# EAGLE board plugV7-Relay-NO (EAGLE 7.5.0)
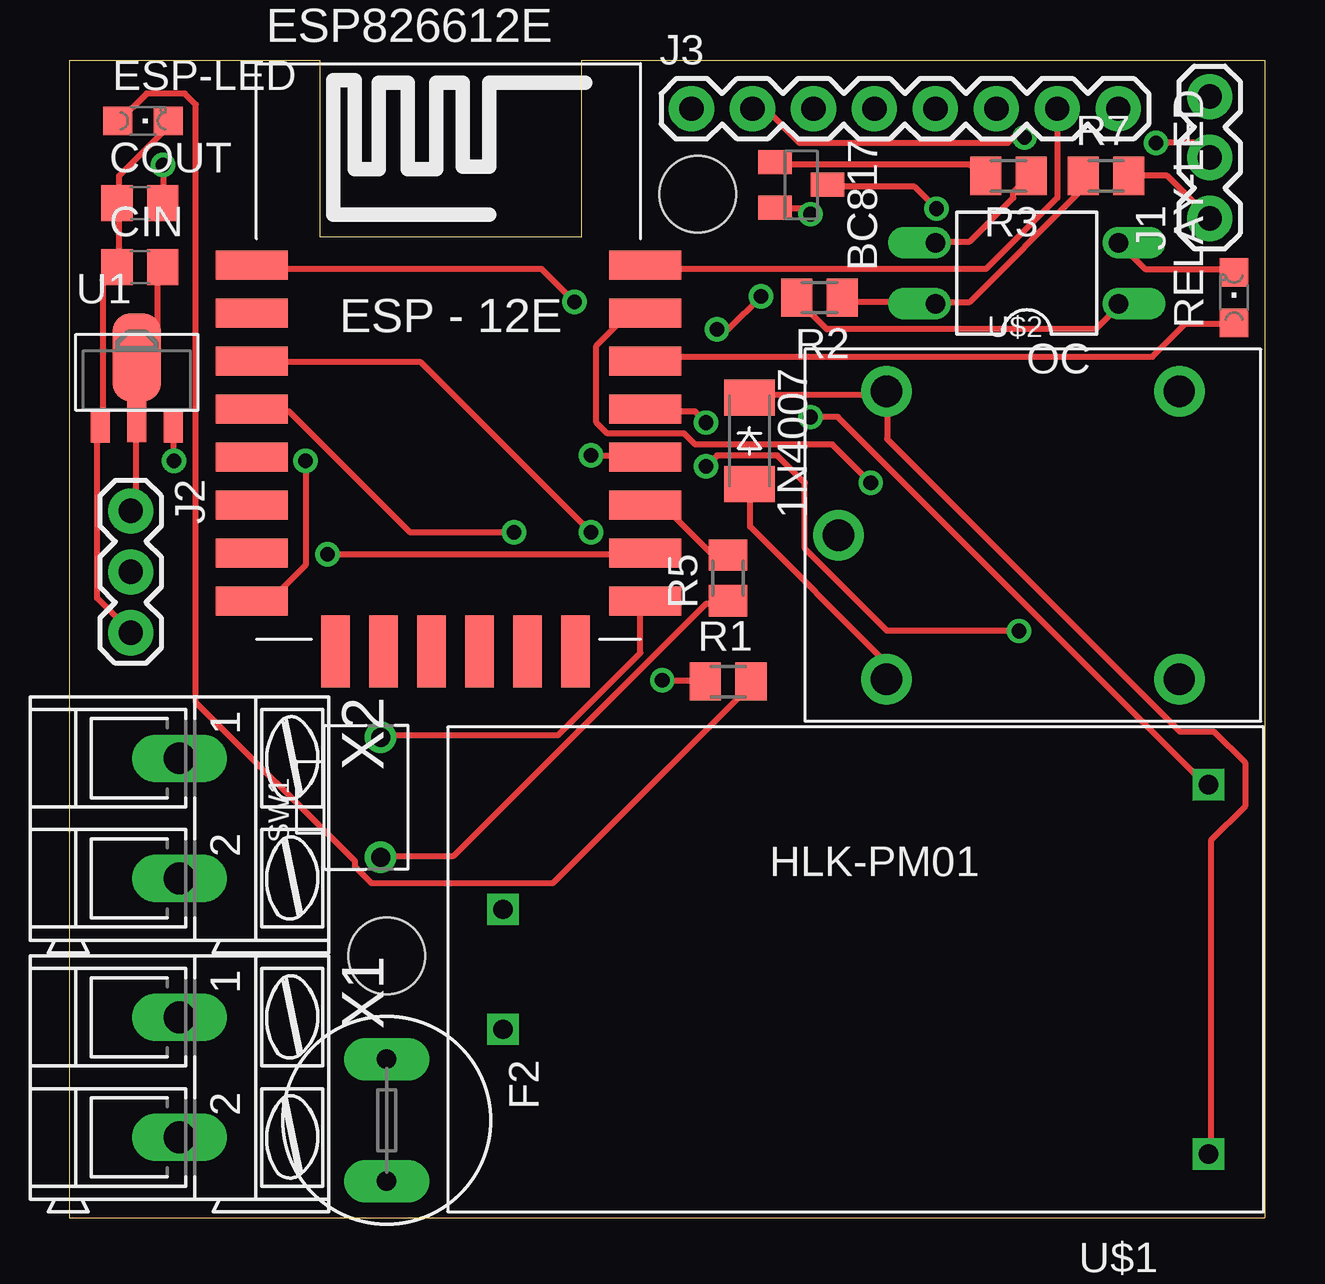
[diagram p0: board, top side]
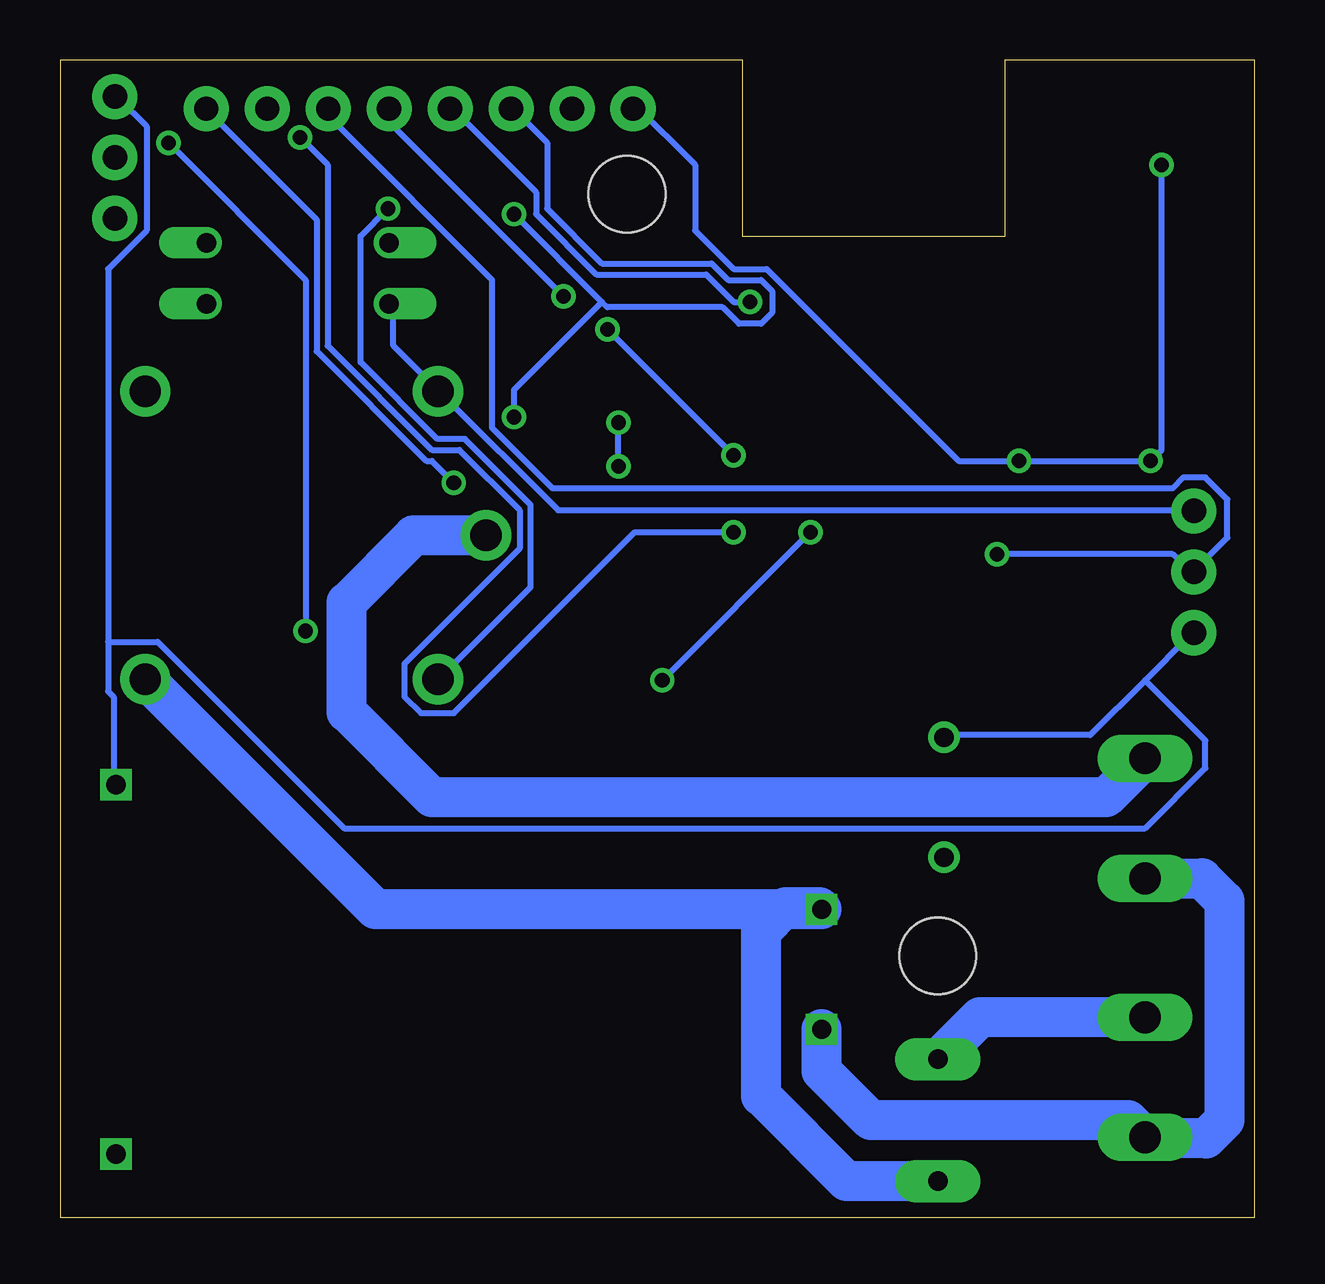
[diagram p1: board, bottom side, seen from below]

Size 49.78 x 48.26 mm. Coordinates in mm from the lower left corner, seen from the top.
Outline: 0,0 49.78,0 49.78,48.26 21.34,48.26 21.34,40.89 10.41,40.89 10.41,48.26 0,48.26 0,0
Copper layers (1*16): Top 0.035mm / dielectric 1.5mm / Bottom 0.035mm
Design rules "default": minimum track width 10mil, minimum drill 24mil, track to track 8mil, track to pad 8mil, pad to pad 8mil, via to via 8mil, smd to smd 8mil, copper to edge 40mil, drill to drill 8mil, minimum pad ring 10mil, minimum via ring 8mil, stop-mask expansion 4mil, vias tented up to drill 0mil, thermal gap 10mil
Holes 3.2 mm at 13.21,10.92 26.16,42.67

## Footprints (pad centres in the part's own frame; a part is rotated, then mirrored left to right if it is on the bottom)
SOD-123_MINI-SMA = smd 1.5 x 2.1: A 1.8,0; C -1.8,0
SOT23-BEC = smd 1 x 1.4: B -0.95,-1.1; C 0,1.1; E 0.95,-1.1
C0805 = smd 1.3 x 1.5: 1 -0.95,0; 2 0.95,0
ESP12E-SMD = smd 3 x 1.2: ADC -8.3,3.8; CH_PD -8.3,1.8; GND 8.1,-8.2; GPIO0 8.1,-2.2; GPIO2 8.1,-4.2; GPIO4 8.1,-0.2; GPIO5 8.1,1.8; GPIO12 -8.3,-4.2; GPIO13 -8.3,-6.2; GPIO14 -8.3,-2.2; GPIO15 8.1,-6.2; GPIO16 -8.3,-0.2; RESET -8.3,5.8; RXD0 8.1,3.8; TXD0 8.1,5.8; VCC -8.3,-8.2 | smd 1.2 x 3: CS0 -4.8,-10.3; GPIO9 -0.8,-10.3; GPIO10 1.2,-10.3; MISO -2.8,-10.3; MOSI 3.2,-10.3; SCLK 5.2,-10.3
CHIPLED_0805 = smd 1.2 x 1.2: A 0,-1.05; C 0,1.05
TR5 = drill 0.813 pad 1.778 long: 1 -2.54,0; 2 2.54,0
1X03 = drill 1.016 pad 1.88: 1 0,0; 2 2.54,0; 3 5.08,0
1X08_ROUND = drill 1.016 pad 1.88: 1 0,0; 2 2.54,0; 3 5.08,0; 4 7.62,0; 5 10.16,0; 6 12.7,0; 7 15.24,0; 8 17.78,0
DIL04 = drill 0.813 offset: 1 -1.27,-3.81; 2 1.27,-3.81; 3 1.27,3.81; 4 -1.27,3.81
M0805 = smd 1.3 x 1.6: 1 -0.95,0; 2 0.95,0
SW2-5.0-6.0X3.0X4.3MM = drill 0.8 pad 1.27: 1 -2.5,0; 2 2.5,0
SOT89 = smd 0.8 x 1.4: 1 -1.524,-1.905; 3 1.524,-1.905 | smd 0.8 x 1.9: 2 0,-1.651 | smd 2.032 x 3.65: 4 0,0.94
HLK-PM01 = drill 0.8 square: +5V 15.19,-7.76; AC1 -14.21,2.44; AC2 -14.21,-2.56; GND 15.19,7.64
RELAY-SONGLE = drill 1.3 pad 2.1: COM -8.1,0; NC 6.1,6; NO 6.1,-6; V+ -6.1,6; V- -6.1,-6
AK300/2 = drill 1.321 long: 1 -2.515,0; 2 2.489,0

## Placement (x,y rotation side)
1N4007  [SOD-123_MINI-SMA]  28.32,32.38 270 top
BC817  [SOT23-BEC]  30.48,43.05 270 top
CIN  1uF  [C0805]  2.92,39.62 0 top
COUT  1uF  [C0805]  2.92,42.29 0 top
ESP826612E  Value  [ESP12E-SMD]  15.88,33.91 0 top
ESP-LED  [CHIPLED_0805]  3.05,45.72 270 top
F2  [TR5]  13.21,4.06 270 top
J1  [1X03]  47.5,41.66 90 top
J2  [1X03]  2.54,29.46 270 top
J3  [1X08_ROUND]  25.91,46.23 0 top
OC  PC817  [DIL04]  39.88,39.37 90 top
R1  240  [M0805]  27.43,22.35 0 top
R2  1k  [M0805]  31.24,38.35 180 top
R3  470  [M0805]  39.12,43.43 180 top
R5  470  [M0805]  27.43,26.67 90 top
R7  240  [M0805]  43.18,43.43 0 top
RELAY-LED  [CHIPLED_0805]  48.51,38.35 0 top
SW1  [SW2-5.0-6.0X3.0X4.3MM]  12.95,17.53 90 top
U1  XC6206PR  [SOT89]  2.79,34.92 0 top
U$1  HLK-PM01  [HLK-PM01]  32.26,10.41 0 top
U$2  RELAY-SONGLE  [RELAY-SONGLE]  40.13,28.45 0 top
X1  220V  [AK300/2]  4.57,5.84 270 top
X2  Plug  [AK300/2]  4.57,16.64 270 top

## Library data of the parts
1N4007 = diode
BC817 = transistor-neu-to92
CIN COUT R1-R3 R5 R7 = rcl
ESP826612E = esp8266modules
ESP-LED RELAY-LED = led
F2 = fuse; OC_FARNELL: unknown; OC_NEWARK: unknown
J1 J2 = SparkFun-Connectors
J3 = SparkFun-Connectors; PROD_ID: CONN-08437
OC = optocoupler; MPN: PC817X4J000F; OC_FARNELL: 9707727; OC_NEWARK: 97K7059
SW1 = Seeed-OPL-Switch
U1 = IC
U$1 = HLK-PM01
U$2 = Seeed-OPL-Relay
X1 X2 = con-ptr500; OC_FARNELL: unknown; OC_NEWARK: unknown

## Nets
+5V: 1N4007.C CIN.2 J2.1 OC.4 R2.1 R7.1 U1.2 U1.4 U$1.+5V U$2.V+
EN: ESP826612E.CH_PD J3.2
GND: BC817.E CIN.1 COUT.1 ESP826612E.GND ESP-LED.C J1.3 J2.3 J3.3 SW1.2 U1.1 U$1.GND
GPIO0: ESP826612E.GPIO0 J3.5
GPIO2: ESP826612E.GPIO2 R5.2
GPIO4: ESP826612E.GPIO4 J1.2
GPIO5: ESP826612E.GPIO5 RELAY-LED.A
GPIO12: ESP826612E.GPIO12
GPIO13: ESP826612E.GPIO13
GPIO14: ESP826612E.GPIO14
GPIO15: ESP826612E.GPIO15 J2.2 J3.6
GPIO16: ESP826612E.GPIO16 R1.1
N$1: F2.2 U$1.AC1 U$2.NO
N$2: OC.3 R3.1
N$3: U$1.AC2 X1.2 X2.2
N$4: U$2.COM X2.1
N$5: BC817.B R3.2
N$6: OC.2 RELAY-LED.C
N$7: R5.1 SW1.1
N$8: ESP-LED.A R1.2
N$9: J1.1 R7.2
N$10: F2.1 X1.1
N$13: OC.1 R2.2
N$18: 1N4007.A BC817.C U$2.V-
RST: ESP826612E.RESET J3.4
RX: ESP826612E.RXD0 J3.8
TX: ESP826612E.TXD0 J3.7
V33: COUT.2 ESP826612E.VCC J3.1 U1.3

## Tracks (layer width: path | path; a pad name or v marks a point on that pad's centre or on a via)
+5V
  Top 0.254: R2.1 32.23,38.18 35.89,38.18 OC.4 36.12,38.18 37.49,38.18 42.06,42.75 42.06,43.43 R7.1 | CIN.2 3.66,39.55 3.66,36.58 2.97,35.89 U1.4 2.74,35.66 2.74,33.38 U1.2 2.74,33.15 2.74,29.49 J2.1 | 1N4007.C 28.35,34.29 33.83,34.29 U$2.V+ 34.06,34.29 34.06,32.46 46.25,20.27 47.68,20.27 48.97,18.97 48.97,17.14 47.55,15.72 47.55,2.74 U$1.+5V
  Bottom 0.254: J2.1 2.74,29.49 29.03,29.49 33.83,34.29 U$2.V+ 34.06,34.52 35.89,36.35 35.89,37.95 OC.4
EN  (via drill 0.61)
  Top 0.254: v21.72,28.57 14.63,35.66 7.77,35.66 ESP826612E.CH_PD | v39.78,45.03 39.32,45.03 39.09,44.81 30.4,44.81 29.03,46.18 28.57,46.18 J3.2
  Bottom 0.254: v21.72,28.57 25.83,28.57 33.38,21.03 34.75,21.03 35.43,21.72 35.43,23.09 30.63,27.89 30.63,29.49 33.15,32 34.29,32 38.63,36.35 38.63,43.89 v39.78,45.03
GND  (via drill 0.61)
  Top 0.254: 2.06,42.29 2.06,43.43 3.89,45.26 3.89,45.72 ESP-LED.C | 2.06,42.29 2.06,39.78 CIN.1 1.83,39.55 1.37,39.09 1.37,33.15 U1.1 1.14,32.92 1.14,25.83 2.52,24.46 J2.3 | 2.06,42.29 COUT.1 | ESP826612E.GND 23.77,25.6 23.77,23.55 20.34,20.12 13.03,20.12 SW1.2 | v30.86,41.83 30.63,42.06 29.49,42.06 BC817.E | v30.86,33.38 32,33.38 47.32,18.06 U$1.GND
  Bottom 0.254: 4.57,22.4 2.74,24.23 J2.3 | 4.57,22.4 6.86,20.12 12.8,20.12 SW1.2 | 27.2,38.18 26.98,37.95 22.17,37.95 21.49,37.26 20.57,37.26 20.12,37.72 20.12,38.63 20.57,39.09 21.95,39.09 22.63,39.78 27.2,39.78 29.49,42.06 29.49,44.81 30.86,46.18 J3.3 | 27.2,38.18 v30.86,41.83 | 47.78,24 47.78,39.55 46.18,41.15 46.18,45.49 47.32,46.63 J1.3 | 47.78,24 47.78,21.95 47.55,21.72 47.55,18.06 U$1.GND | 27.2,38.18 30.86,34.52 v30.86,33.38 | 4.57,22.4 2.06,19.89 2.06,18.75 4.57,16.23 37.95,16.23 45.72,24 47.78,24
GPIO0  (via drill 0.61)
  Top 0.254: v21.72,31.77 23.77,31.77 ESP826612E.GPIO0 | v26.98,37.03 27.43,37.03 v28.8,38.41
  Bottom 0.254: v26.98,37.03 v21.72,31.77 | v28.8,38.41 35.89,45.49 35.89,46.18 J3.5
GPIO2
  Top 0.254: R5.2 27.43,27.66 26.75,27.66 24.92,29.49 24,29.49 ESP826612E.GPIO2
GPIO4  (via drill 0.61)
  Top 0.254: v26.52,33.15 26.06,33.6 24,33.6 ESP826612E.GPIO4 | v26.52,31.32 26.98,31.77 29.49,31.77 30.63,30.63 30.63,27.89 34.06,24.46 v39.55,24.46 | v45.26,44.81 46.86,44.81 47.32,44.35 J1.2
  Bottom 0.254: v26.52,31.32 v26.52,33.15 | v39.55,24.46 39.55,39.09 v45.26,44.81
GPIO5
  Top 0.254: RELAY-LED.A 48.46,37.26 46.48,37.26 45.11,35.89 24,35.89 ESP826612E.GPIO5
GPIO15  (via drill 0.61)
  Top 0.254: v10.74,27.66 23.77,27.66 ESP826612E.GPIO15
  Bottom 0.254: v10.74,27.66 3.43,27.66 2.74,26.98 J2.2 2.52,26.98 1.14,28.35 1.14,29.95 2.06,30.86 2.97,30.86 3.43,30.4 29.26,30.4 31.77,32.92 31.77,39.09 38.41,45.72 38.41,46.18 J3.6
GPIO16  (via drill 0.61)
  Top 0.254: v24.69,22.4 26.29,22.4 R1.1 | v18.52,28.57 14.17,28.57 9.14,33.6 7.77,33.6 ESP826612E.GPIO16
  Bottom 0.254: v18.52,28.57 v24.69,22.4
N$1
  Bottom 1.676: F2.2 17.02,1.52 20.57,5.08 20.57,11.94 19.56,12.95 18.15,12.95 U$1.AC1 36.64,12.85 U$2.NO
N$2
  Top 0.254: R3.1 40.01,43.43 39.32,42.75 39.32,42.52 37.49,40.69 36.12,40.69 OC.3
N$3
  Bottom 1.676: X2.2 2.21,14.15 1.27,13.21 1.27,4.06 2.03,3.3 4.52,3.3 X1.2 5.28,4.06 16,4.06 18.05,6.11 U$1.AC2
N$4
  Bottom 1.676: X2.1 6.2,17.53 34.29,17.53 37.85,21.08 37.85,25.65 35.05,28.45 U$2.COM
N$5
  Top 0.254: BC817.B 29.49,43.89 37.49,43.89 37.95,43.43 R3.2
N$6
  Top 0.254: RELAY-LED.C 48.46,39.55 44.81,39.55 43.89,40.46 OC.2
N$7
  Top 0.254: R5.1 27.43,25.6 26.52,25.6 16,15.09 13.03,15.09 SW1.1
N$8
  Top 0.254: ESP-LED.A 2.06,45.72 3.2,46.86 4.8,46.86 5.26,46.41 5.26,21.49 11.89,14.86 11.89,14.63 12.57,13.95 20.12,13.95 28.35,22.17 R1.2
N$9
  Top 0.254: R7.2 45.72,43.43 J1.1
N$10
  Bottom 1.676: X1.1 11.46,8.36 F2.1
N$13
  Top 0.254: R2.2 30.4,38.18 31.55,37.03 42.75,37.03 43.66,37.95 OC.1
N$18  (via drill 0.61)
  Top 0.254: v36.12,42.06 35.2,42.98 31.77,42.98 BC817.C | 1N4007.A 28.35,30.4 28.35,28.8 33.83,23.32 33.83,22.63 U$2.V-
  Bottom 0.254: v36.12,42.06 37.26,40.92 37.26,35.66 34.06,32.46 32.92,32.46 30.18,29.72 30.18,26.29 33.83,22.63 U$2.V-
RST  (via drill 0.61)
  Top 0.254: v21.03,38.18 19.66,39.55 7.77,39.55 ESP826612E.RESET
  Bottom 0.254: v21.03,38.18 21.72,38.18 22.86,39.32 27.43,39.32 29.95,41.83 29.95,42.75 33.38,46.18 J3.4
RX  (via drill 0.61)
  Top 0.254: v33.38,30.63 31.77,32.23 26.06,32.23 25.6,32.69 22.4,32.69 21.95,33.15 21.95,36.35 23.09,37.49 23.77,37.49 ESP826612E.RXD0
  Bottom 0.254: v33.38,30.63 34.29,31.55 34.52,31.55 39.09,36.12 39.09,41.6 43.66,46.18 J3.8
TX
  Top 0.254: J3.7 41.15,42.52 38.18,39.55 24,39.55 ESP826612E.TXD0
V33  (via drill 0.61)
  Top 0.254: v4.34,31.55 4.34,32.92 U1.3 | v3.89,43.89 3.89,42.29 COUT.2 | v9.83,31.55 9.83,27.2 8.46,25.83 7.77,25.83 ESP826612E.VCC
  Bottom 0.254: J3.1 25.83,46.41 23.32,43.89 23.32,41.15 21.72,39.55 20.34,39.55 12.34,31.55 v9.83,31.55 v4.34,31.55 3.89,32 v3.89,43.89